# Altium PCB Flight_Controller_PCB.PcbDoc (part 2 of 2)
Units mil, origin at the board's own origin, x right, y up, seen from the top; angles counter-clockwise.
Board outline 6000 x 4000 mil, 4 copper layers (Top Layer, PWR, GND, Bottom Layer), stack 23.756 mil thick; 110 components, 96 nets, 505 pads, 5 vias.
Unrouted connection lines stored in the file: 342.
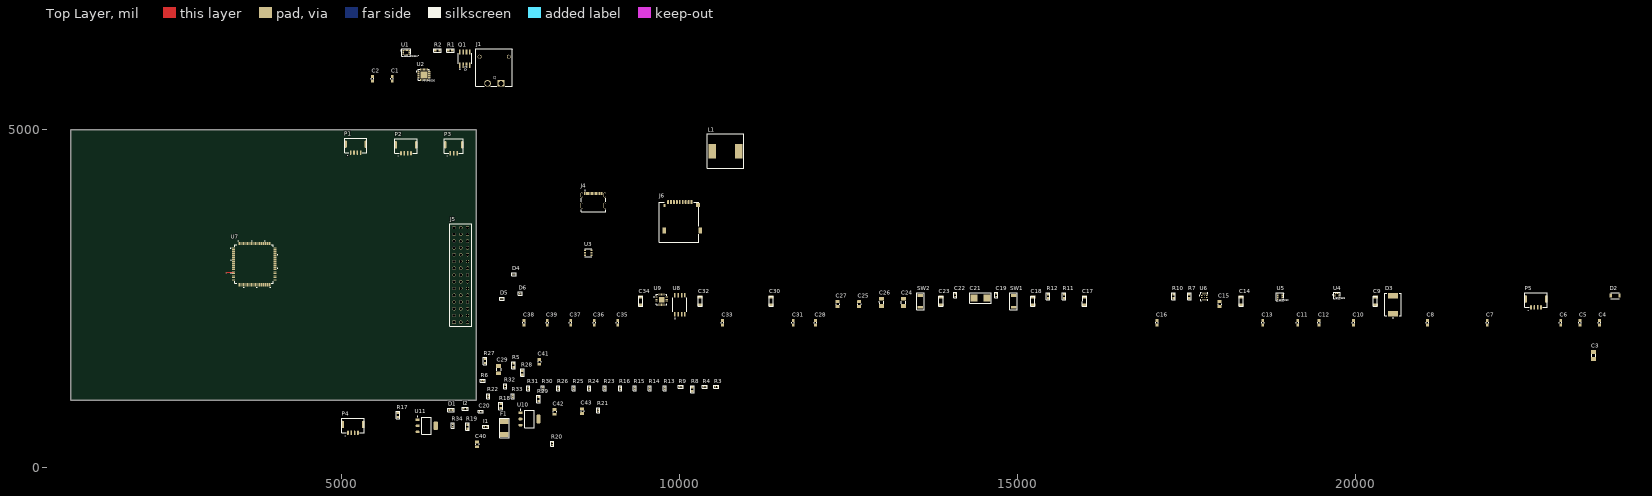
[diagram p0: Top Layer view]

## Part data (continued)
R3 R15 R16 R23 R26: library part RES_0402_0R, "RES 0 OHM JUMPER 1/16W 0402", Case/Package=0402, LCSC Part Number=C60485, Manufacturer=Yageo, Manufacturer Part Number=RC0402JR-070RL, Max Operating Temperature=155°C, Min Operating Temperature=-55°C, Package Height=0.35mm, Package Length=1mm, Package Shape=Rectangular, Package Style=SMTMeter, Package Width=0.5mm, POWER=62.5mW, Rated Temperature=70°C, Resistor Type="FIXED RESISTOR", Category="Chip SMD Resistors", ComponentLink1Description=https://datasheet.ciiva.com:443/pdfs/VipMasterIC/IC/YAGO/YAGO-S-A0008145938/YAGO-S-A0008145938-1.pdf?src-supplier=IHS+Markit, ComponentLink1URL=https://datasheet.ciiva.com:443/pdfs/VipMasterIC/IC/YAGO/YAGO-S-A0008145938/YAGO-S-A0008145938-1.pdf?src-supplier=IHS+Markit, Construction=Chip, JESD-609 Code=e3, Mounting Technology="Surface Mount", Packaging="Tape and Reel", Pins=2, Pricing="1=0.1, 10=0.011, 25=0.0084, 50=0.0064, 100=0.0045, 250=0.00364, 500=0.0029, 1000=0.00214, 5000=0.00154 (USD)", Reach SVHC Compliant=Yes, RoHS=Yes, RoHS Compliant=Yes, Stock=5988729, Supplier=LCSC, Supplier Part Number=C60485, Technology="METAL GLAZE/THICK FILM", Terminal Finish=Nickel, Termination=Wraparound
R4 R14 R20 R21 R22 R30 R34: library part RES_0402_10K, "RES SMD 10K OHM 1% 1/16W 0402", Case/Package=0402, LCSC Part Number=C144807, Manufacturer=Yageo, Manufacturer Part Number=AC0402FR-0710KL, Max Operating Temperature=155°C, Min Operating Temperature=-55°C, Package Height=0.32mm, Package Length=1mm, Package Shape=Rectangular, Package Style=SMTMeter, Package Width=0.5mm, POWER=62.5mW, Rated Temperature=70°C, Resistor Type="FIXED RESISTOR", Temperature Coefficient=100ppm/°C, Tolerance=1%, Working Voltage=50V, Additional Feature="LASER TRIMMABLE", Category="Chip SMD Resistors", ComponentLink1Description=https://datasheet.ciiva.com:443/pdfs/VipMasterIC/IC/YAGO/YAGO-S-A0003597364/YAGO-S-A0003597364-1.pdf?src-supplier=IHS+Markit, ComponentLink1URL=https://datasheet.ciiva.com:443/pdfs/VipMasterIC/IC/YAGO/YAGO-S-A0003597364/YAGO-S-A0003597364-1.pdf?src-supplier=IHS+Markit, ComponentLink2Description=https://datasheet.ciiva.com/12656/pyu-ac-51-rohs-l-2-12656634.pdf?src-supplier=Mouser, ComponentLink2URL=https://datasheet.ciiva.com/12656/pyu-ac-51-rohs-l-2-12656634.pdf?src-supplier=Mouser, Construction=Chip, JESD-609 Code=e3, Mounting Technology="Surface Mount", Packaging="Tape and Reel", Pins=2, Pricing="1=0.1, 10=0.019, 50=0.0116, 100=0.0095, 500=0.00638, 1000=0.00544, 5000=0.00391 (USD)", Reach SVHC Compliant=Yes, Reference Standard=AEC-Q200, RoHS=Yes, RoHS Compliant=Yes, Stock=1122213, Supplier=LCSC, Supplier Part Number=C144807, Technology="METAL GLAZE/THICK FILM", Terminal Finish=Nickel, Termination=Wraparound
R5 R8 R17 R18 R19 R27 R28 R29: library part RES_0603_49.9K, "49.9kΩ ±1% 100mW 0603 Thick Film Resistor", Manufacturer=FOJAN, Manufacturer Part Number=FRC0603F4992TS, Supplier Part Number=C2930109, Supplier=LCSC
R6: "9.2kΩ 63mW 50V Thin Film Resistor ±25ppm/℃ ±0.1% 0402 Chip Resistor - Surface Mount RoHS", ComponentLink1Description=datasheet, ComponentLink1URL=https://www.lcsc.com/product-detail/C852968.html?s_z=n_resistance%25209.2K
R7 R10 R11: library part RES_0603_23.7K, "23.7kΩ ±1% 100mW 0603 Thick Film Resistor", POWER=100mW, ComponentLink1Description=datasheet, ComponentLink1URL=https://www.lcsc.com/product-detail/C22912.html?s_z=n_resistance%252023.7k%2520
R9 R13 R32 R33: library part RES_0402_5.1K, "RES SMD 5.1K OHM 1% 1/16W 0402", Case/Package=0402, LCSC Part Number=C144745, Manufacturer=Yageo, Manufacturer Part Number=AC0402FR-075K1L, Max Operating Temperature=155°C, Min Operating Temperature=-55°C, Package Height=0.32mm, Package Length=1mm, Package Shape=Rectangular, Package Style=SMTMeter, Package Width=0.5mm, POWER=62.5mW, Rated Temperature=70°C, Resistor Type="FIXED RESISTOR", Temperature Coefficient=100ppm/°C, Tolerance=1%, Working Voltage=50V, Additional Feature="LASER TRIMMABLE", Category="Chip SMD Resistors", ComponentLink1Description=https://datasheet.ciiva.com:443/pdfs/VipMasterIC/IC/YAGO/YAGO-S-A0003597364/YAGO-S-A0003597364-1.pdf?src-supplier=IHS+Markit, ComponentLink1URL=https://datasheet.ciiva.com:443/pdfs/VipMasterIC/IC/YAGO/YAGO-S-A0003597364/YAGO-S-A0003597364-1.pdf?src-supplier=IHS+Markit, ComponentLink2Description=https://datasheet.octopart.com/AC0402FR-075K1L-Yageo-datasheet-166720450.pdf?src-supplier=Future+Electronics, ComponentLink2URL=https://datasheet.octopart.com/AC0402FR-075K1L-Yageo-datasheet-166720450.pdf?src-supplier=Future+Electronics, ComponentLink3Description=http://www.yageo.com/documents/recent/PYu-AC_51_RoHS_L_2_revised.pdf?src-supplier=Future+Electronics, ComponentLink3URL=http://www.yageo.com/documents/recent/PYu-AC_51_RoHS_L_2_revised.pdf?src-supplier=Future+Electronics, Construction=Chip, JESD-609 Code=e3, Mounting Technology="Surface Mount", Packaging="Tape and Reel", Pins=2, Pricing="1=0.1, 10=0.019, 50=0.0116, 100=0.0095, 500=0.00638, 1000=0.00544, 5000=0.00391 (USD)", Reach SVHC Compliant=Yes, Reference Standard=AEC-Q200, RoHS=Yes, RoHS Compliant=Yes, Stock=164969, Supplier=LCSC, Supplier Part Number=C144745, Technology="METAL GLAZE/THICK FILM", Terminal Finish=Nickel, Termination=Wraparound
R12: library part RES_0603_51.1K, "51.1kΩ ±0.1% 100mW 0603 Thin Film Resistor AEC-Q200", ComponentLink1Description=Datasheet, ComponentLink1URL=https://www.lcsc.com/product-detail/C491138.html?s_z=n_resistance%252051.1k%2520
R24 R25: library part RES_0402_27R, "RES 27 OHM 1% 1/16W 0402", Case/Package=0402, Manufacturer=Yageo, Manufacturer Part Number=RC0402FR-0727RL, Max Operating Temperature=155°C, Min Operating Temperature=-55°C, Package Height=0.35mm, Package Length=1mm, Package Shape=Rectangular, Package Style=SMTMeter, Package Width=0.5mm, POWER=62.5mW, Rated Temperature=70°C, Resistor Type="FIXED RESISTOR", Supplier Part Number=C138021, Temperature Coefficient=100ppm/°C, Tolerance=1%, Working Voltage=50V, Additional Feature="LASER TRIMMABLE", Category="Chip SMD Resistors", ComponentLink1Description=https://datasheet.ciiva.com:443/pdfs/VipMasterIC/IC/YAGO/YAGO-S-A0008145938/YAGO-S-A0008145938-1.pdf?src-supplier=IHS+Markit, ComponentLink1URL=https://datasheet.ciiva.com:443/pdfs/VipMasterIC/IC/YAGO/YAGO-S-A0008145938/YAGO-S-A0008145938-1.pdf?src-supplier=IHS+Markit, ComponentLink2Description=https://datasheet.ciiva.com/11808/0900766b80c66297-11808450.pdf?src-supplier=Rs, ComponentLink2URL=https://datasheet.ciiva.com/11808/0900766b80c66297-11808450.pdf?src-supplier=Rs, ComponentLink3Description=https://datasheet.ciiva.com/7849/1018594-7849927.pdf?src-supplier=Element14, ComponentLink3URL=https://datasheet.ciiva.com/7849/1018594-7849927.pdf?src-supplier=Element14, ComponentLink4Description=https://datasheet.ciiva.com/7849/1018594-7849926.pdf?src-supplier=Element14, ComponentLink4URL=https://datasheet.ciiva.com/7849/1018594-7849926.pdf?src-supplier=Element14, Construction=Chip, JESD-609 Code=e3, Mounting Technology="Surface Mount", Packaging="Tape and Reel", Pins=2, Pricing="1=0.1, 10=0.015, 50=0.0088, 100=0.0073, 500=0.00488, 1000=0.00417, 5000=0.00297 (USD)", Reach SVHC Compliant=Yes, RoHS=Yes, RoHS Compliant=Yes, SPL=C138021, Stock=423061, Supplier=LCSC, Technology="METAL GLAZE/THICK FILM", Terminal Finish=Nickel, Termination=Wraparound
R31: library part RES_0402_4.7K, "RES 4.7K OHM 1% 1/16W 0402", Case/Package=0402, LCSC Part Number=C105871, Manufacturer=Yageo, Manufacturer Part Number=RC0402FR-074K7L, Max Operating Temperature=155°C, Min Operating Temperature=-55°C, Package Height=0.35mm, Package Length=1mm, Package Shape=Rectangular, Package Style=SMTMeter, Package Width=0.5mm, POWER=62.5mW, Rated Temperature=70°C, Resistor Type="FIXED RESISTOR", Temperature Coefficient=100ppm/°C, Tolerance=1%, Working Voltage=50V, Additional Feature="LASER TRIMMABLE", Category="Chip SMD Resistors", ComponentLink1Description=https://datasheet.ciiva.com:443/pdfs/VipMasterIC/IC/YAGO/YAGO-S-A0008145938/YAGO-S-A0008145938-1.pdf?src-supplier=IHS+Markit, ComponentLink1URL=https://datasheet.ciiva.com:443/pdfs/VipMasterIC/IC/YAGO/YAGO-S-A0008145938/YAGO-S-A0008145938-1.pdf?src-supplier=IHS+Markit, ComponentLink2Description=https://datasheet.ciiva.com/22661/1686128-22661342.pdf?src-supplier=Element14, ComponentLink2URL=https://datasheet.ciiva.com/22661/1686128-22661342.pdf?src-supplier=Element14, ComponentLink3Description=https://datasheet.ciiva.com/7850/1018594-7850022.pdf?src-supplier=Element14, ComponentLink3URL=https://datasheet.ciiva.com/7850/1018594-7850022.pdf?src-supplier=Element14, ComponentLink4Description=https://datasheet.ciiva.com/7850/1018594-7850023.pdf?src-supplier=Element14, ComponentLink4URL=https://datasheet.ciiva.com/7850/1018594-7850023.pdf?src-supplier=Element14, ComponentLink5Description=https://datasheet.ciiva.com/15215/getdatasheetpartid-328119-15215035.pdf?src-supplier=Verical, ComponentLink5URL=https://datasheet.ciiva.com/15215/getdatasheetpartid-328119-15215035.pdf?src-supplier=Verical, Construction=Chip, JESD-609 Code=e3, Mounting Technology="Surface Mount", Packaging="Tape and Reel", Pins=2, Pricing="1=0.1, 10=0.015, 50=0.0088, 100=0.0073, 500=0.00488, 1000=0.00417, 5000=0.00297 (USD)", Reach SVHC Compliant=Yes, RoHS=Yes, RoHS Compliant=Yes, Stock=9886878, Supplier=LCSC, Supplier Part Number=C105871, Technology="METAL GLAZE/THICK FILM", Terminal Finish=Nickel, Termination=Wraparound
SW1: library part PUSH_BUTTON1, Manufacturer=XUNPU, Manufacturer Part Number=TS-1088-AR02016, Supplier Part Number=C720477, Datasheet=https://www.lcsc.com/datasheet/C720477.pdf, Supplier=LCSC
SW2: Manufacturer=XUNPU, Manufacturer Part Number=TS-1088-AR02016, Supplier Part Number=C720477, Datasheet=https://www.lcsc.com/datasheet/C720477.pdf, Supplier=LCSC
U1: "Accelerometer Gyroscope LGA-14(2.5x3) IMUs (Inertial Measurement Units) RoHS", Manufacturer="TDK InvenSense", Supplier Part Number=C1850418, Manufacturer Part Number=ICM-42688-P, Supplier=LCSC
U2: "Accelerometer Gyroscope QFN-24-EP(4x4) Accelerometers RoHS", Manufacturer="TDK InvenSense", Supplier Part Number=C92401, Manufacturer Part Number=MPU-6000, Supplier=LCSC
U3: "Converter DC/DC; buck; Vout: 0.8-30V; Vin: 4.5-36V; 1.2A; 0.45MHz; -40+85 deg.C; SMD; SOT23", Ambient Temperature Range High=85°C, Case/Package=SOT-23-6, Frequency=450kHz, Manufacturer="Alpha & Omega Semiconductor", Max Input Voltage=36V, Max Junction Temperature (Tj)=150°C, Max Output current=1.2A, Max Switching Frequency=540kHz, Min Input Voltage=4.5V, Min Operating Temperature=-40°C, Min Output Voltage=800mV, Nominal Input Voltage=12V, Nominal Supply Current=1mA, Supplier Part Number 1=785-1613-1-ND, Category="Voltage Regulators - Switching", ComponentLink1Description=https://datasheet.octopart.com:443/AOZ1282CI-Alpha-%26-Omega-Semiconductor-datasheet-182233402.pdf?src-supplier=IHS, ComponentLink1URL=https://datasheet.octopart.com:443/AOZ1282CI-Alpha-%26-Omega-Semiconductor-datasheet-182233402.pdf?src-supplier=IHS, ComponentLink2Description=https://datasheet.octopart.com:443/AOZ1282CI-Alpha-%26-Omega-Semiconductor-datasheet-67314984.pdf?src-supplier=ODG+(Origin+Data+Global), ComponentLink2URL=https://datasheet.octopart.com:443/AOZ1282CI-Alpha-%26-Omega-Semiconductor-datasheet-67314984.pdf?src-supplier=ODG+(Origin+Data+Global), ComponentLink3Description=https://sigma.octopart.com:443/138895817/technical_drawing/Alpha-%26-Omega-Semiconductor-AOZ1282CI.pdf?src-supplier=Upverter, ComponentLink3URL=https://sigma.octopart.com:443/138895817/technical_drawing/Alpha-%26-Omega-Semiconductor-AOZ1282CI.pdf?src-supplier=Upverter, ComponentLink4Description=https://datasheet.octopart.com:443/AOZ1282CI-Alpha-%26-Omega-Semiconductor-datasheet-188851037.pdf?src-supplier=TME, ComponentLink4URL=https://datasheet.octopart.com:443/AOZ1282CI-Alpha-%26-Omega-Semiconductor-datasheet-188851037.pdf?src-supplier=TME, ComponentLink5Description=https://sigma.octopart.com:443/142346442/technical_drawing/Alpha-%26-Omega-Semiconductor-AOZ1282CI.pdf?src-supplier=Alpha+%26+Omega+Semiconductor+SCT, ComponentLink5URL=https://sigma.octopart.com:443/142346442/technical_drawing/Alpha-%26-Omega-Semiconductor-AOZ1282CI.pdf?src-supplier=Alpha+%26+Omega+Semiconductor+SCT, ComponentLink6Description=https://datasheet.octopart.com/AOZ1282CI-Alpha-%26-Omega-Semiconductor-datasheet-47864051.pdf, ComponentLink6URL=https://datasheet.octopart.com/AOZ1282CI-Alpha-%26-Omega-Semiconductor-datasheet-47864051.pdf, Height=1.25mm, Height - Seated (Max)=1.25mm, Lead Free="Lead Free", Length=2.9mm, Lifecycle Status=Production, Manufacturer Part Number=AOZ1282CI, Max Duty Cycle=87%, Max Operating Temperature=85°C, Max Output Voltage=36V, Max Supply Voltage=36V, Min Supply Voltage=4.5V, Mount="Surface Mount", Number of Circuits=1, Number of Outputs=1, Number of Pins=6, Number of Terminals=6, Output Configuration=Positive, Output Current=1.2A, Output Type=Adjustable, Output Voltage=36V, Packaging=Digi-Reel®, Pricing 1="1=1.04, 10=0.751, 25=0.678, 100=0.5979, 250=0.55972, 500=0.53664, 1000=0.51767 (USD)", REACH SVHC=Yes, RoHS=Compliant, Schedule B="8542390000, 8542390000|8542390000|8542390000|8542390000|8542390000", Stock 1=13583, Supplier 1=DigiKey, Switching Frequency=450kHz, Synchronous Rectifier=No, Terminal Pitch=950µm, Topology=Buck, Width=1.6mm
U4: "30Kpa~1.25bar LGA-10(2x2) Pressure Sensors, Transducers RoHS", Manufacturer=Bosch, Supplier Part Number=C779278, Manufacturer Part Number=BMP388, Supplier=LCSC
U5: "30Kpa~1.1bar LGA-8(2x2.5) Pressure Sensors, Transducers RoHS", Manufacturer=Bosch, Supplier Part Number=C83291, Manufacturer Part Number=BMP280, Supplier=LCSC
U6: library part "TI TPS2121RUXT___", "2.8V~22V 2 VQFN-HR-12(2x2.5) OR Controllers, Ideal Diodes RoHS", LCSC Part=C2156025, Manufacturer=TI, Package=VQFN-HR-12(2x2.5), LCSC Link=https://www.lcsc.com/product-detail/C2156025.html?s_z=n_TPS2121, Mfr. Part=TPS2121RUXT
U8: library part 128Mb_FLASH, "NOR Flash Serial (SPI, Dual SPI, Quad SPI) 3.3V 128M-bit 16M x 8 6ns 8-Pin SOIC Tube", Ambient Temperature Range High=85°C, Case/Package=SOIC, Clock Frequency=133MHz, Frequency=104MHz, Manufacturer=Winbond, Manufacturer Part Number=W25Q128JVSIQ, Max Supply Current=20mA, Max Supply Voltage=3.6V, Min Operating Temperature=-40°C, Min Supply Voltage=2.7V, Operating Supply Voltage=3V, Supplier Part Number=C97521, Category=Flash, China RoHS=Compliant, ComponentLink1Description=https://datasheet.octopart.com:443/W25Q128JVSIQ-Winbond-datasheet-181529389.pdf?src-supplier=ODG+(Origin+Data+Global), ComponentLink1URL=https://datasheet.octopart.com:443/W25Q128JVSIQ-Winbond-datasheet-181529389.pdf?src-supplier=ODG+(Origin+Data+Global), ComponentLink2Description=https://sigma.octopart.com:443/138898685/technical_drawing/Winbond-W25Q128JVSIQ.pdf?src-supplier=Upverter, ComponentLink2URL=https://sigma.octopart.com:443/138898685/technical_drawing/Winbond-W25Q128JVSIQ.pdf?src-supplier=Upverter, ComponentLink3Description=https://datasheet.octopart.com:443/W25Q128JVSIQ-Winbond-datasheet-138898757.pdf?src-supplier=Upverter, ComponentLink3URL=https://datasheet.octopart.com:443/W25Q128JVSIQ-Winbond-datasheet-138898757.pdf?src-supplier=Upverter, ComponentLink4Description=https://datasheet.octopart.com:443/W25Q128JVSIQ-Winbond-datasheet-138104337.pdf?src-supplier=Augswan, ComponentLink4URL=https://datasheet.octopart.com:443/W25Q128JVSIQ-Winbond-datasheet-138104337.pdf?src-supplier=Augswan, Height=2.16mm, Height - Seated (Max)=2.16mm, Interface=Serial, Length=5.23mm, Lifecycle Status=Production, Max Operating Temperature=85°C, Memory Format=FLASH, Memory Size=16MB, Number of Circuits=1, Number of Terminals=8, Pricing="1=1.97, 10=1.846, 25=1.7932, 90=1.71878, 180=1.6785, 270=1.65493, 540=1.61485, 1080=1.57507, 5040=1.48849 (USD)", REACH SVHC=Yes, RoHS=Compliant, Schedule B="8542320070, 8542320070|8542320070, 8542320070|8542320070|8542320070, 8542320070|8542320070|8542320070|8542320070", Stock=16290, Supplier=LCSC, Terminal Pitch=1.27mm, Width=5.23mm
U9: "IC USB SERIAL FULL UART 20QFN", Case/Package=HVQCCN, LCSC Part Number=C132159, Manufacturer=FTDI, Max Operating Temperature=85°C, Max Supply Current=8.4mA, Max Supply Voltage=5.5V, Min Operating Temperature=-40°C, Min Supply Voltage=2.97V, Nominal Supply Voltage=5V, Package Shape=Square, Package Style="CHIP CARRIER, HEAT SINK/SLUG, VERY THIN PROFILEMeter", Power Supplies=3.3/5V, Temperature Grade=INDUSTRIAL, Category="Interface ICs", ComponentLink1Description=https://datasheet.ciiva.com:443/pdfs/VipMasterIC/IC/FTDI/FTDIS00099/FTDIS00099-1.pdf?src-supplier=IHS+Markit, ComponentLink1URL=https://datasheet.ciiva.com:443/pdfs/VipMasterIC/IC/FTDI/FTDIS00099/FTDIS00099-1.pdf?src-supplier=IHS+Markit, ComponentLink2Description=https://datasheet.ciiva.com/1787/ds-ft231x-1787312.pdf?src-supplier=Digikey, ComponentLink2URL=https://datasheet.ciiva.com/1787/ds-ft231x-1787312.pdf?src-supplier=Digikey, ComponentLink3Description=https://datasheet.ciiva.com/4787/ds-ft231x-13571-4787570.pdf?src-supplier=Mouser, ComponentLink3URL=https://datasheet.ciiva.com/4787/ds-ft231x-13571-4787570.pdf?src-supplier=Mouser, ComponentLink4Description=https://datasheet.ciiva.com/30475/0900766b811020d3-30475405.pdf?src-supplier=Rs, ComponentLink4URL=https://datasheet.ciiva.com/30475/0900766b811020d3-30475405.pdf?src-supplier=Rs, ComponentLink5Description=https://datasheet.ciiva.com/1787/ft-x-series-1787313.pdf?src-supplier=Digikey, ComponentLink5URL=https://datasheet.ciiva.com/1787/ft-x-series-1787313.pdf?src-supplier=Digikey, ComponentLink6Description=https://datasheet.ciiva.com/1787/ft-x-series-1787314.pdf?src-supplier=Digikey, ComponentLink6URL=https://datasheet.ciiva.com/1787/ft-x-series-1787314.pdf?src-supplier=Digikey, Height - Seated (Max)=0.8mm, JESD-30 Code=S-XQCC-N20, Length=4mm, Manufacturer Part Number=FT231XQ-R, Pins=20, Pricing="1=2.34, 25=2.27, 100=2.2, 250=2, 500=1.82002, 1000=1.7625 (USD)", Qualification Status="Not Qualified", Reach SVHC Compliant=Yes, RoHS=Yes, RoHS Compliant=Yes, Stock=77572, Supplier=LCSC, Supplier Part Number=C132159, Surface Mount=Yes, Technology=CMOS, Terminal Form="No Lead", Terminal Pitch=0.5mm, Terminal Position=QUAD, Width=4mm
U10 U11: library part AMS1117-3.3, "Gull Wing EAR99 Fixed Positive Single Output Ldo Regulator Dual Voltage Regulator Linear 125C 1.2W 1A 1.8MM", Case/Package=SOT-223, Dropout Voltage=1.1V, Manufacturer="Advanced Monolithic Systems", Max Junction Temperature (Tj)=125°C, Max Power Dissipation=1.2W, Max Supply Voltage=15V, Min Operating Temperature=-40°C, Nominal Supply Current=5mA, Output Current=1A, Output Voltage=3.3V, Supplier Part Number=C6186, Category="Voltage Regulators - Linear", ComponentLink1Description=https://datasheet.octopart.com:443/AMS1117-3.3-Advanced-Monolithic-Systems-datasheet-31830847.pdf?src-supplier=Upverter, ComponentLink1URL=https://datasheet.octopart.com:443/AMS1117-3.3-Advanced-Monolithic-Systems-datasheet-31830847.pdf?src-supplier=Upverter, Height=1.8mm, Manufacturer Part Number=AMS1117-3.3, Max Operating Temperature=125°C, Number of Outputs=1, Pins=2, Pricing="5=1.3215, 5=1.2073, 5=0.1656, 5=0.1441, 50=0.9186, 50=0.126, 50=1.0055, 50=0.1097, 150=0.8507, 150=0.7772, 150=0.0928, 150=0.1066, 500=0.651, 500=0.0777, 500=0.0893, 500=0.7127, 2500=0.6744, 2500=0.0736, 2500=0.6161, 2500=0.0845, 5000=0.652, 5000=0.5956, 5000=0.0711, 5000=0.0817 (HKD)", RoHS=Compliant, Stock=747810, Supplier=LCSC

## Via types
v1: diameter 15.75, hole 7.87, Top Layer to Bottom Layer, 4 vias
v2: diameter 20, hole 15, Top Layer to Bottom Layer, 1 vias

## Nets (pads, with @x,y where several pads share a name; then routed paths per layer and width w, separated by ;. In a path a pad name is that pad's centre, name@x,y a point inside that pad or via, vN(x,y) a via of type N, cw(c..) or ccw(c..) an arc to the next point about the centre after c; other vN are vias at no path point)
3V3: C1.1 C2.1 C3.2 C5.1 C7.1 C10.1 C11.1 C12.1 C13.1 C32.2 C33.1 C34.1 C35.1 J6.4 R1.2 R2.1 R16.1 R17.2 R18.2 R19.2 R20.2 R21.2 R22.2 R23.1 R27.1 R28.1 R29.1 SW2.2 U1.1 U1.5 U1.8 U2.13 U4.1 U4.10 U5.6 U5.8 U8.8
5V: C15.2 P1.1 P2.1 P4.1 P5.1 U6.1 U6.8
  other v1: 17749.25,2543.78 17780.75,2543.78
+3V3_FTDI: C37.2 C38.2 R23.2 R26.1 U9.10 U9.20
+5V_VBUS1: C17.2 C28.2 C29.2 D4.2 I1.2 R11.2 R15.1 R31.2 U6.2
  other v1: 17749.25,2516.22
BARO1_CS: U4.6 U7.28
BARO2_CS: U5.2 U7.51
BARO_MISO: U4.5 U5.5 U7.53
BARO_MOSI: U4.4 U5.3 U7.54
BOOT0: R14.1 SW2.1 U7.94
CON1_USB_N: D5.2 J4.5 J4.7 R24.1
CON1_USB_P: D6.2 J4.6 J4.8 R25.1
DTR_FTDI: C36.1 U9.18
FDCAN1_RX: P5.3 U7.81
FDCAN1_TX: P5.2 U7.82
FDCAN2_RX: P2.3 U7.91
FDCAN2_TX: P2.2 U7.92
FTDI_RESET: C39.2 R26.2 U9.11
FTDI_USB_N: R24.2 U9.9
FTDI_USB_P: R25.2 U9.8
GND: C1.2 C2.2 C3.1 C4.2 C5.2 C6.1 C7.2 C9.1 C10.2 C11.2 C12.2 C13.2 C14.1 C15.1 C16.2 C17.1 C18.2 C19.1 C20.1 C22.2 C23.2 C24.1 C25.1 C26.1 C27.1 C28.1 C29.1 C30.1 C31.1 C32.1 C33.2 C34.2 C35.2 C37.1 C38.1 C39.1 C40.1 C41.1 C42.1 C43.1 D2.1 D3.A D4.1 D5.1 D6.1 I2.1 I2.2 J1.2 J4.1 J4.12 J4.S1 J4.S2 J4.S3 J4.S4 J5.1 J5.2 J5.3 J5.4 J5.5 J5.6 J5.7 J5.8 J5.9 J5.10 J5.11 J5.12 J5.13 J5.14 J5.15 J6.6 J6.10 J6.11 J6.12 J6.13 P1.4 P1.GND P2.4 P2.GND P3.3 P3.GND P4.4 P4.GND P5.4 P5.GND R3.1 R6.1 R9.1 R10.1 R12.1 R13.1 R14.2 R30.2 R32.1 R33.1 R34.1 SW1.2 U1.2 U1.3 U1.6 U1.7 U1.9 U1.10 U1.11 U2.1 U2.9 U2.11 U2.18 U2.25 U3.2 U4.3 U4.8 U4.9 U5.1 U5.7 U6.3 U6.9 U6.12 U7.10 U7.19 U7.26 U7.49 U7.74 U7.99 U8.4 U9.3 U9.13 U9.21 U10.1 U11.1 | length 114.8
  Top Layer w10: v2(3300,2880) 3311.89,2891.89 U7.19
I2C1_SCL: P4.2 U7.95
I2C1_SDA: P4.3 U7.93
I2C2_SCL: P1.2 R2.2 U7.46
I2C2_SDA: P1.3 R1.1 U7.47
IMU1_CS: U1.12 U7.41
IMU2_CS: U2.8 U7.77
IMU_MOSI: U1.14 U2.24 U7.44
IMU_SPI4_SCK: U1.13 U2.23 U7.42
Input: C40.2 C41.2 C42.2 C43.2 D2.2 F1.1 J1.1
MCU_3V3: C27.2 U7.6 U7.11 U7.20 U7.21 U7.27 U7.50 U7.75 U7.100 U11.2 U11.4
NetC4_1: C4.1 U2.20
NetC6_2: C6.2 U2.10
NetC8_1: C8.1 D3.C L1.1 U3.6
NetC8_2: C8.2 U3.1
NetC9_2: C9.2 L1.2 R5.2
NetC16_1: C16.1 U6.11
NetC18_1: C18.1 U7.73
NetC19_2: C19.2 C21.2 U7.12
NetC21_1: C21.1 C22.1 U7.13
NetC23_1: C23.1 U7.48
NetC24_2: C24.2 U10.3
NetC26_2: C26.2 U11.3
NetC30_2: C30.2 C31.2 R15.2 R16.2 U9.12
NetD1_A: D1.A Q1.4 R3.2
NetF1_2: F1.2 Q1.1 Q1.2 Q1.3
NetI1_1: I1.1 J4.2 J4.11
NetJ4_4: J4.4 R33.2
NetJ4_10: J4.10 R32.2
NetJ6_9: J6.9 R29.2
NetR4_2: R4.2 U3.4
NetR5_1: R5.1 R6.2 U3.3
NetR7_1: R7.1 R9.2 U6.5
NetR8_1: R8.1 R10.2 U6.6
NetR11_1: R11.1 R13.2 U6.4
NetR12_2: R12.2 U6.10
NetR30_1: R30.1 U9.15
PC13: C36.2 U7.7
PE3: U7.2
QUADSPI_BK1_IO0: U7.58 U8.5
QUADSPI_BK1_IO1: U7.59 U8.2
QUADSPI_BK1_IO2: R21.1 U7.1 U8.3
QUADSPI_BK1_IO3: R22.1 U7.60 U8.7
QUADSPI_BK1_NCS: R20.1 U7.88 U8.1
QUADSPI_CLK: U7.36 U8.6
RST: C20.2 SW1.1 U7.14
RTS_FTDI: U9.19
RXD_FTDI: U7.23
RXS_FTDI: U9.1
SDMMC1_CK: J6.5 U7.80
SDMMC1_CMD: J6.3 R17.1 U7.83
SDMMC1_D0: J6.7 R27.2 U7.65
SDMMC1_D1: J6.8 R28.2 U7.66
SDMMC1_D2: J6.1 R19.1 U7.78
SDMMC1_D3: J6.2 R18.1 U7.79
SPI2_SCK: U4.2 U5.4 U7.52
System_5v: C14.2 R7.2 R8.2 U6.7
  other v1: 17780.75,2516.22
TIM1_CH1: J5.32 U7.67
TIM1_CH2: J5.33 U7.68
TIM1_CH3: J5.34 U7.69
TIM1_CH4: J5.35 U7.70
TIM2_CH1: J5.36 U7.29
TIM2_CH2: J5.37 U7.89
TIM2_CH3: J5.38 U7.24
TIM2_CH4: J5.39 U7.25
TIM3_CH1: J5.40 U7.63
TIM3_CH2: J5.41 U7.64
TIM3_CH3: J5.42 U7.34
TIM3_CH4: J5.43 U7.35
TIM4_CH3: J5.44 U7.61
TIM4_CH4: J5.45 U7.62
TXD_FTDI: U7.22 U9.17
UART8_RX: P3.2 U7.97
V_OUT: C25.2 U10.2 U10.4
VBUS_SENSE: R31.1 R34.2 U9.16
VCC_SERVO_EXTERNAL: J5.23 J5.24 J5.25 J5.26 J5.27 J5.28 J5.29 J5.30
VIN_FO: D1.K Q1.5 Q1.6 Q1.7 Q1.8 R4.1 U3.5
pads on no net: J1. J4.3 J4.9 J5.16 J5.17 J5.18 J5.19 J5.20 J5.21 J5.22 J5.31 P3.1 U1.4 U2.2 U2.3 U2.4 U2.5 U2.6 U2.7 U2.12 U2.14 U2.15 U2.16 U2.17 U2.19 U2.21 U2.22 U4.7 U7.3 U7.4 U7.5 U7.8 U7.9 U7.15 U7.16 U7.17 U7.18 U7.30 U7.31 U7.32 U7.33 U7.37 U7.38 U7.39 U7.40 U7.43 U7.45 U7.55 U7.56 U7.57 U7.71 U7.72 U7.76 U7.84 U7.85 U7.86 U7.87 U7.90 U7.96 U7.98 U9.2 U9.4 U9.5 U9.6 U9.7 U9.14